# EAGLE board arduinoNanoE2training (EAGLE 9.1.1)
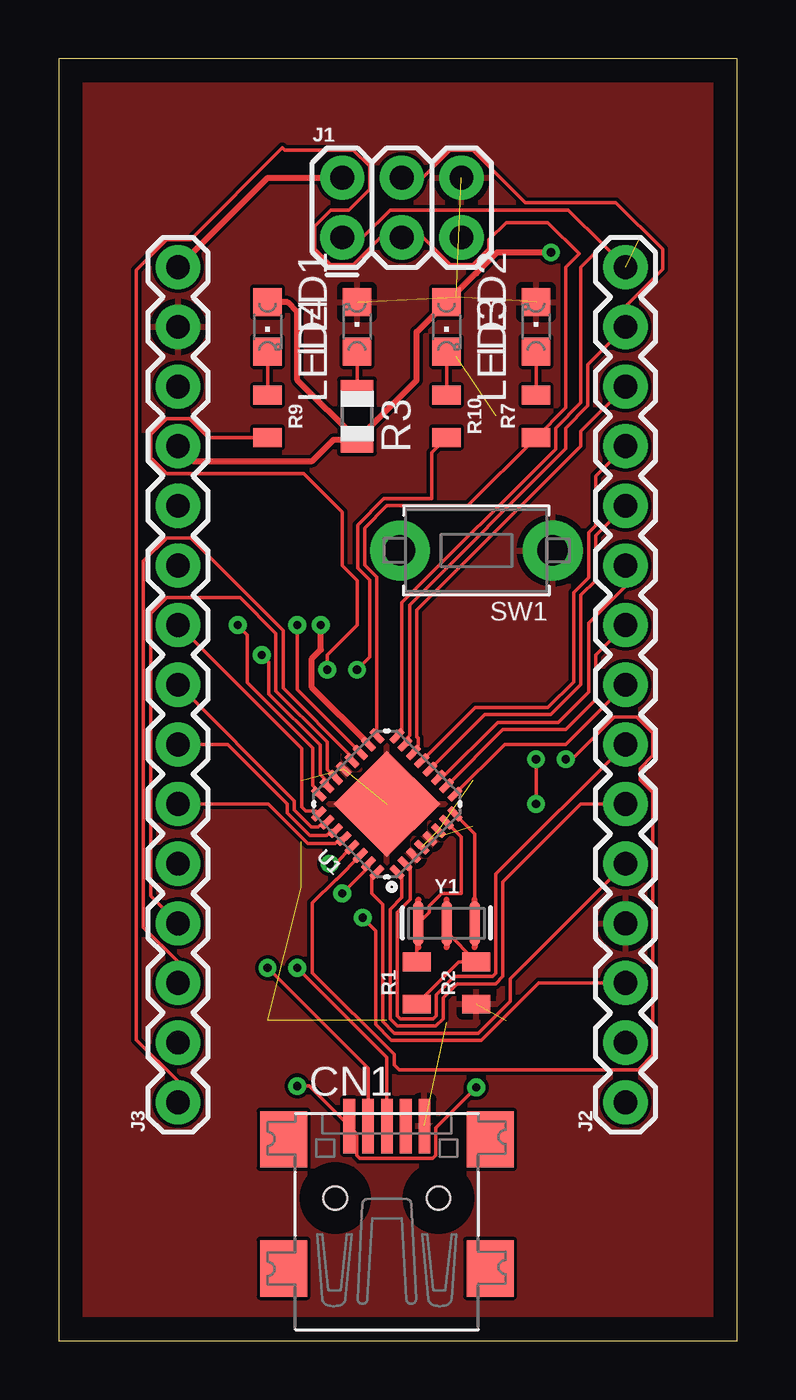
[diagram p0: board, top side]
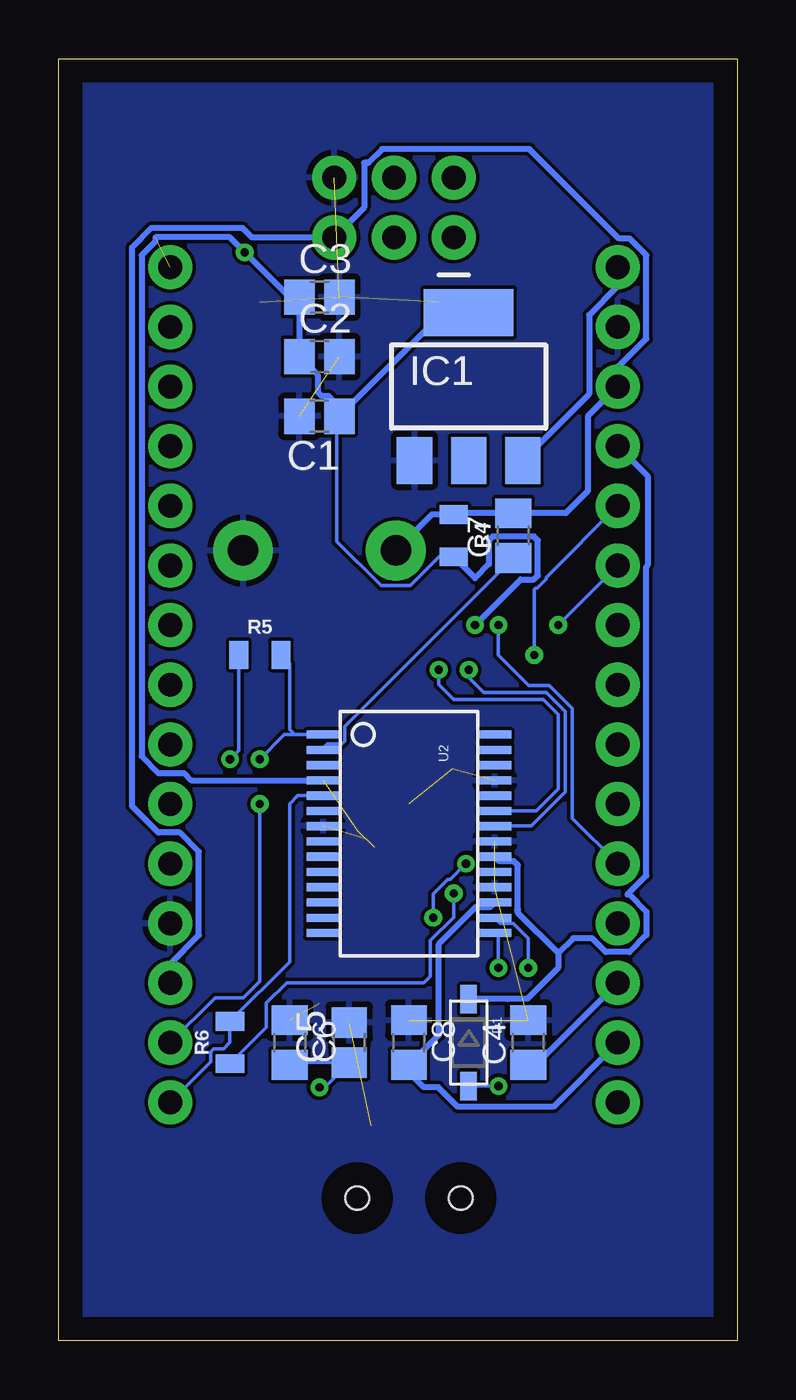
[diagram p1: board, bottom side, seen from below]

Size 28.88 x 54.6 mm. Coordinates in mm from the lower left corner, seen from the top.
Outline: 0,0 28.88,0 28.88,54.6 0,54.6 0,0
Copper layers (1*16): Top 0.035mm / dielectric 1.5mm / Bottom 0.035mm
Design rules "default": minimum track width 6mil, minimum drill 0.35mm, track to track 6mil, track to pad 6mil, pad to pad 6mil, via to via 6mil, smd to smd 6mil, copper to edge 40mil, drill to drill 6mil, minimum pad ring 10mil, minimum via ring 8mil, stop-mask expansion 4mil, vias tented up to drill 0mil, thermal gap 10mil

## Footprints (pad centres in the part's own frame; a part is rotated, then mirrored left to right if it is on the bottom)
C0805 = smd 1.3 x 1.5: 1 -0.85,0; 2 0.85,0
0805 = smd 1.27 x 1.524: 1 -0.953,0; 2 0.953,0
USB-MINIB = smd 0.5 x 2.308: D+ 0,4.064; D- -0.8,4.064; GND 1.6,4.064; ID 0.8,4.064; VBUS -1.6,4.064 | smd 2 x 2.4: GND1 -4.4,-2; GND2 -4.4,3.5; GND3 4.4,3.5; GND4 4.4,-2 | hole 1: -2.2,1; 2.2,1
SOD-123 = smd 1.2 x 0.7: A 1.85,0; C -1.85,0
SOT223 = smd 1.5 x 2: 1 -2.3,-3.15; 2 0,-3.15; 3 2.3,-3.15 | smd 3.8 x 2: 4 0,3.15
2X3 = drill 1.016 pad 1.88: 1 0,0; 2 0,2.54; 3 2.54,0; 4 2.54,2.54; 5 5.08,0; 6 5.08,2.54
1X15 = drill 1.016 pad 1.88: 1 0,0; 2 2.54,0; 3 5.08,0; 4 7.62,0; 5 10.16,0; 6 12.7,0; 7 15.24,0; 8 17.78,0; 9 20.32,0; 10 22.86,0; 11 25.4,0; 12 27.94,0; 13 30.48,0; 14 33.02,0; 15 35.56,0
CHIPLED_0805 = smd 1.2 x 1.2: A 0,-1.05; C 0,1.05
0805' = smd 0.8 x 1.2: 1 -0.9,0; 2 0.9,0
R0805 = smd 1.1 x 1.4: 1 -1,0; 2 1,0
TACT_PANA-EVQ = drill 1.3 pad 2.54: P$1 -3.25,0; P$2 3.25,0
MLF32-PAD = smd 0.7 x 0.3: 1 -2.35,1.75; 2 -2.35,1.25; 3 -2.35,0.75; 4 -2.35,0.25; 5 -2.35,-0.25; 6 -2.35,-0.75; 7 -2.35,-1.25; 8 -2.35,-1.75; 17 2.35,-1.75; 18 2.35,-1.25; 19 2.35,-0.75; 20 2.35,-0.25; 21 2.35,0.25; 22 2.35,0.75; 23 2.35,1.25; 24 2.35,1.75 | smd 0.3 x 0.7: 9 -1.75,-2.35; 10 -1.25,-2.35; 11 -0.75,-2.35; 12 -0.25,-2.35; 13 0.25,-2.35; 14 0.75,-2.35; 15 1.25,-2.35; 16 1.75,-2.35; 25 1.75,2.35; 26 1.25,2.35; 27 0.75,2.35; 28 0.25,2.35; 29 -0.25,2.35; 30 -0.75,2.35; 31 -1.25,2.35; 32 -1.75,2.35 | smd 3.2 x 3.2: PAD 0,0
SSOP28DB = smd 0.348 x 1.397: 1 -4.225,-3.656; 2 -3.575,-3.656; 3 -2.925,-3.656; 4 -2.275,-3.656; 5 -1.625,-3.656; 6 -0.975,-3.656; 7 -0.325,-3.656; 8 0.325,-3.656; 9 0.975,-3.656; 10 1.625,-3.656; 11 2.275,-3.656; 12 2.925,-3.656; 13 3.575,-3.656; 14 4.225,-3.656; 15 4.225,3.656; 16 3.575,3.656; 17 2.925,3.656; 18 2.275,3.656; 19 1.625,3.656; 20 0.975,3.656; 21 0.325,3.656; 22 -0.325,3.656; 23 -0.975,3.656; 24 -1.625,3.656; 25 -2.275,3.656; 26 -2.925,3.656; 27 -3.575,3.656; 28 -4.225,3.656
RESONATOR-SMD-3.2X1.3 = smd 0.45 x 1.905: 1 -1.2,0; 2 0,0; 3 1.2,0

## Placement (x,y rotation side)
C1  4.7uF  [C0805]  17.78,39.37 180 bottom
C2  4.7uF  [C0805]  17.78,41.91 0 bottom
C3  0.1uF  [C0805]  17.78,44.45 0 bottom
C4  0.1uF  [0805]  8.89,12.7 90 bottom
C5  4.7uF  [C0805]  16.51,12.7 90 bottom
C6  0.1uF  [0805]  19.05,12.7 270 bottom
C7  0.1uF  [0805]  9.53,34.29 90 bottom
C8  0.1uF  [0805]  13.97,12.7 270 bottom
CN1  [USB-MINIB]  13.97,5.08 0 top
D1  [SOD-123]  11.43,12.7 270 bottom
IC1  LM317MSTT3  [SOT223]  11.43,40.64 0 bottom
J1  FEMALE 2x3  [2X3]  12.06,46.99 0 top
J2  [1X15]  24.13,10.16 90 top
J3  [1X15]  5.08,10.16 90 top
LED1  [CHIPLED_0805]  12.7,43.18 0 top
LED2  [CHIPLED_0805]  20.32,43.18 0 top
LED3  [CHIPLED_0805]  16.51,43.18 180 top
LED4  [CHIPLED_0805]  8.89,43.18 180 top
R1  1M  [0805']  15.24,15.24 90 top
R2  27  [0805']  17.78,15.24 90 top
R3  680  [R0805]  12.7,39.37 270 top
R4  680  [0805']  12.06,34.29 270 bottom
R5  100  [0805']  20.32,29.21 0 bottom
R6  100  [0805']  21.59,12.7 90 bottom
R7  680  [0805']  20.32,39.37 90 top
R9  680  [0805']  8.89,39.37 270 top
R10  680  [0805']  16.51,39.37 270 top
SW1  [TACT_PANA-EVQ]  17.78,33.66 180 top
U1  [MLF32-PAD]  13.97,22.86 135 top
U2  [SSOP28DB]  13.97,21.59 270 bottom
Y1  16MHz  [RESONATOR-SMD-3.2X1.3]  16.51,17.78 0 top

## Library data of the parts
C1-C3 C5 CN1 D1 LED1-LED4 R3 SW1 = adafruit
C4 C6-C8 = cap-master
IC1 = lasser
J1 = SparkFun-Connectors; PROD_ID: CONN-11566
J2 J3 = SparkFun-Connectors
R1 R2 R4-R7 R9 R10 = SparkFun-Resistors
U1 = SparkFun-IC-Microcontroller
U2 = microbuilder
Y1 = SparkFun-Clocks; PROD_ID: XTAL-08900

## Nets
3.3V: C8.2 J3.2 U2.17
+5V: C1.1 C2.1 C3.1 D1.C IC1.4 J3.12 LED3.A LED4.A R3.2 R4.2 U1.4 U1.6 U1.18 U2.4 U2.20
A0: J3.11 U1.23
A1: J3.10 U1.24
A2: J3.9 U1.25
A3: J3.8 U1.26
A4: J3.7 U1.27
A5: J3.6 U1.28
A6: J3.5 U1.19
A7: J3.4 U1.22
AREF: C4.1 J3.3 U1.20
D0/RX: J2.2 R5.2 U2.1
D1/TX: J2.1 R6.2 U2.5
D2: J2.5 U1.32
D3: J2.6 U1.1
D4: J2.7 U1.2
D5: J2.8 U1.9
D6: J2.9 U1.10
D7: J2.10 U1.11
D8: J2.11 U1.12
D9: J2.12 U1.13
D10: J2.13 U1.14
D11/MOSI: J1.4 J2.14 U1.15
D12/MISO: J1.1 J2.15 U1.16
D13/SCK: J1.3 J3.1 R7.1 U1.17
GND: C1.2 C2.2 C3.2 C4.2 C5.2 C6.1 C8.1 CN1.GND IC1.1 J1.6 J2.4 J3.14 LED1.C LED2.C R2.1 SW1.P$1 U1.3 U1.5 U1.21 U1.PAD U2.7 U2.18 U2.21 U2.25
N$1: LED3.C R10.1
N$2: LED4.C R9.1
N$3: LED1.A R3.1
N$4: R9.2 U2.22
N$5: R10.2 U2.23
N$6: C7.1 U2.2
N$7: R1.2 U1.7 Y1.1
N$8: U1.8 Y1.3
N$9: R1.1 R2.2 Y1.2
N$10: CN1.D- U2.16
N$11: CN1.D+ U2.15
N$18: R5.1 U1.30
N$19: R6.1 U1.31
N$22: LED2.A R7.2
RESET: C7.2 J1.5 J2.3 J3.13 R4.1 SW1.P$2 U1.29
VIN: IC1.3 J1.2 J3.15
VUSB: C5.1 C6.2 CN1.VBUS D1.A

## Tracks (layer width: path | path; a pad name or v marks a point on that pad's centre or on a via)
3.3V
  Bottom 0.254: J3.2 7.81,9.97 11.9,9.97 12.72,10.79 13.34,10.79 13.97,11.43 C8.2 12.7,13.02 12.7,16.9 11.13,18.47 10.51,18.47 U2.17
+5V  (via drill 0.35)  (2 unrouted)
  Top 0.254: J3.12 5.71,37.47 10.79,37.47 11.7,38.37 R3.2 | R3.2 10.16,40.91 10.16,43.81 9.74,44.23 LED4.A | R3.2 15.24,40.91 15.24,42.96 LED3.A 17.75,45.47 17.78,45.47 18.66,46.35 v20.95,46.35 | v11.16,30.48 11.16,29.44 10.77,29.05 10.77,27.82 U1.18
  Bottom 0.152: R4.2 12.68,33.39 13.91,32.16 15.15,32.16 17.04,34.04 17.04,39.48
  Bottom 0.254: IC1.4 12.51,43.79 C1.1 17.04,39.48 17.14,39.59 17.14,40.01 17.39,40.25 17.7,40.25 17.86,40.41 17.86,41.14 C2.1 C3.1 19.05,44.45 v20.95,46.35 21.59,46.99 24.77,46.99 24.77,46.81 25.35,46.23 25.35,24.89 24.64,24.18 23.55,24.18 23.23,23.86 U2.4 | J3.12 3.81,36.83 3.81,33.02 3.86,32.97 3.86,19.82 4.68,19 4.58,19 3.86,18.29 3.86,17.27 4.58,16.56 5.58,16.56 6.17,17.14 6.99,17.14 7.62,16.51 | 7.62,16.51 7.62,15.88 8.93,14.57 9.77,14.57 9.79,14.55 D1.C | 7.62,16.51 9.34,18.23 9.34,18.3 9.37,18.34 9.34,18.38 9.34,20.25 9.5,20.42 10.12,20.42 U2.20 | R4.2 11.16,32.48 10.57,33.07 10.57,34.09 10.4,34.25 8.65,34.25 8.48,34.09 8.48,32.59 8.65,32.42 9.21,32.42 v11.16,30.48
A0  (via drill 0.35)
  Top 0.152: 11.25,23.64 U1.23 11.42,23.81 11.12,24.11 11.12,25.37 8.94,27.55 8.94,28.91 v8.64,29.21
  Bottom 0.152: v8.64,29.21 8.64,32 8.57,32.07 8.5,32.07 8.13,32.44 8.13,32.51 J3.11
A1  (via drill 0.35)
  Top 0.152: v7.62,30.48 8.04,30.07 8.04,28.03 10.82,25.24 10.82,23.64 11.07,23.39 U1.24
  Bottom 0.152: J3.10 v7.62,30.48
A2
  Top 0.152: J3.9 10.34,25.22 10.34,22.73 10.52,22.55 10.95,22.55 U1.25
A3
  Top 0.152: 5.71,27.94 J3.8 10.04,22.98 10.04,22.61 10.76,21.89 11.05,21.89 11.25,22.08 U1.26
A4
  Top 0.152: U1.27 11.61,21.73 11.41,21.53 10.68,21.53 9.73,22.48 9.73,22.86 7.19,25.4 J3.7
A5
  Top 0.152: U1.28 11.96,21.38 11.76,21.18 10.61,21.18 8.92,22.86 J3.6
A6  (via drill 0.35)
  Top 0.152: U1.19 10.16,27.73 v10.16,30.48
  Bottom 0.152: J3.5 7.01,22.25 7.01,26.92 8,27.91 8.87,27.91 10.16,29.21 v10.16,30.48
A7
  Top 0.152: J3.4 3.91,18.95 3.91,30.96 4.6,31.65 7.72,31.65 9.25,30.12 9.25,27.68 11.43,25.49 11.43,24.34 U1.22
AREF
  Top 0.152: J3.3 5.08,16.13 3.61,17.6 3.61,33.2 4.6,34.19 5.61,34.19 9.55,30.25 9.55,27.8 12.48,24.87 U1.20
  Bottom 0.254: J3.3 8.57,11.75 C4.1
D0/RX  (via drill 0.35)
  Top 0.152: v20.32,22.86 v20.32,24.77
  Bottom 0.152: R5.2 19.05,28.84 19.05,26.04 18.83,25.82 | 18.83,25.82 17.78,25.82 U2.1 | J2.2 22.23,14.61 21.02,14.61 20.32,15.3 v20.32,22.86 | v20.32,24.77 19.27,25.82 18.83,25.82
D1/TX
  Bottom 0.152: J2.1 22.42,11.87 22.42,12.29 22.29,12.43 21.86,12.43 21.59,12.7 R6.2 19.05,16.14 19.05,22.86 18.7,23.21 U2.5
D2
  Top 0.152: J2.5 19.22,15.41 19.22,14.46 17.86,13.1 14.29,13.1 13.8,13.59 13.8,18.58 13.34,19.05 13.34,19.75 U1.32
D3
  Top 0.152: J2.6 22.23,22.86 18.91,19.55 18.91,15.52 18.6,15.21 16.97,15.21 16.37,14.61 16.37,13.72 16.06,13.41 14.42,13.41 14.11,13.72 14.11,18.38 14.61,18.88 14.61,19.75 U1.1
D4
  Top 0.152: U1.2 14.95,20.11 14.95,18.79 14.41,18.25 14.41,13.85 14.54,13.71 15.94,13.71 16.07,13.85 16.07,14.74 16.84,15.51 18.48,15.51 18.61,15.64 18.61,19.88 J2.7
D5
  Top 0.152: J2.8 21.59,25.4 18.98,25.4 U1.9
D6
  Top 0.152: U1.10 18.91,26.04 21.59,26.04 22.86,27.3 22.86,29.21 J2.9
D7
  Top 0.152: J2.10 24.13,32.13 22.55,30.56 22.55,27.64 21.26,26.34 18.68,26.34 16.33,23.99 U1.11
D8
  Top 0.152: U1.12 18.13,26.67 20.95,26.67 22.23,27.94 22.23,31.75 22.86,32.38 22.86,34.29 J2.11
D9
  Top 0.152: U1.13 17.73,26.98 20.83,26.98 21.92,28.07 21.92,31.88 22.55,32.51 22.55,34.42 22.86,34.72 22.86,36.83 J2.12
D10
  Top 0.152: J2.13 22.23,38.73 22.23,38.1 15.25,31.12 15.25,25.72 15.3,25.67 15.3,25.35 15.1,25.16 U1.14
D11/MOSI
  Top 0.152: 14.92,25.41 U1.15 14.75,25.58 14.95,25.77 14.95,31.34 21.59,37.99 21.59,38.88 22.53,39.82 22.53,41.58 J2.14 24.13,44.07 25.7,45.64 25.7,46.48 23.72,48.46 19.86,48.46 17.63,50.7 16.66,50.7 15.49,49.53 J1.4
D12/MISO  (1 unrouted)
  Top 0.152: J1.1 12.95,46.99 14.12,48.16 21.69,48.16 23.18,46.67 | 24.77,46.99 25.4,46.35 | U1.16 14.61,25.97 14.61,31.43 21.15,37.98 21.15,38.87 22.23,39.94 22.23,45.72 23.18,46.67 | 23.18,46.67 J2.15
D13/SCK
  Top 0.152: U1.17 13.55,32.52 13.03,33.03 13.03,34.62 13.97,35.56 17.41,35.56 R7.1 21.59,39.74 21.59,45.72 22.16,46.29 20.82,47.62 19.05,47.62 18.31,46.89 18.31,46.51 17.63,45.82 16.66,45.82 15.49,46.99 J1.3 13.72,46.99 12.55,45.82 11.58,45.82 10.9,46.51 10.9,47.47 11.58,48.16 12.35,48.16 13.23,49.05 13.23,50.01 12.55,50.7 9.63,50.7 9.53,50.8 5.61,46.89 4.6,46.89 3.3,45.59 3.3,12.83 5.08,11.05 J3.1
GND  (12 unrouted)
  pour Top: -1.27,0 -1.27,55.88 30.48,55.88 30.48,-1.27 -1.27,-1.27
  pour Bottom: -1.27,-1.27 30.48,-1.27 30.48,55.88 -2.54,55.88 -2.54,-1.27
N$1
  Top 0.152: LED3.C R10.1
N$2
  Top 0.152: R9.1 LED4.C
N$3
  Top 0.152: LED1.A R3.1
N$4  (via drill 0.35)
  Top 0.152: R9.2 6.36,38.47 5.56,39.27 4.6,39.27 3.91,38.58 3.91,37.62 4.6,36.93 10.43,36.93 12.06,35.3 12.06,33.02 12.7,32.38 12.7,30.48 11.43,29.21 v11.43,28.57
  Bottom 0.152: U2.22 8.77,21.91 7.32,23.37 7.32,26.8 8.13,27.61 10.79,27.61 11.43,28.25 v11.43,28.57
N$5  (via drill 0.35)
  Top 0.152: R10.2 15.88,37.84 15.88,35.87 13.84,35.87 12.73,34.75 12.73,32.91 13.24,32.39 13.24,29.84 13.24,29.75 13.24,29.12 v12.7,28.57
  Bottom 0.152: U2.23 8.55,22.57 7.62,23.5 7.62,26.67 8.26,27.3 12.06,27.3 12.7,27.94 v12.7,28.57
N$6
  Bottom 0.152: U2.2 17.63,25.24 17.45,25.41 16.83,25.41 16.7,25.55 16.7,26.16 C7.1
N$7
  Top 0.152: R1.2 15.24,17.71 Y1.1 15.77,18.24 15.77,18.52 16.3,19.05 17.14,19.05 17.14,21.45 U1.7
N$8
  Top 0.152: Y1.3 17.71,21.59 U1.8
N$9
  Top 0.152: R1.1 17.04,16.14 R2.2 16.51,17.41 Y1.2
N$10  (via drill 0.35)
  Top 0.152: CN1.D- 13.17,11.6 v8.89,15.88
  Bottom 0.152: 10.08,17.78 U2.16 10.07,17.77 9.52,17.77 8.89,17.14 v8.89,15.88
N$11  (via drill 0.35)
  Top 0.152: CN1.D+ 13.97,12.06 v10.16,15.88
  Bottom 0.152: v10.16,15.88 10.16,17.21 U2.15
N$18  (via drill 0.35)
  Top 0.152: U1.30 11.83,19.66 11.81,19.66 10.79,18.64 10.79,15.67 14.28,12.19 14.28,11.76 14.5,11.53 24.66,11.53 25.3,12.17 25.3,23.34 24.77,23.88 24.77,24.38 25.3,24.92 25.3,25.88 24.61,26.57 23.65,26.57 21.84,24.77 v21.59,24.77
  Bottom 0.152: R5.1 21.22,25.14 v21.59,24.77
N$19  (via drill 0.35)
  Top 0.152: v12.06,19.05 13.19,20.18 U1.31
  Bottom 0.152: R6.1 20.04,13.35 20.04,14.38 19.18,15.24 13.34,15.24 13.06,15.52 13.06,17.04 12.06,18.04 v12.06,19.05
N$22
  Top 0.152: LED2.A R7.2
RESET  (via drill 0.35)
  Top 0.152: U1.29 11.78,20.32 v11.54,20.32 | v12.94,18.02 13.5,17.46 13.5,13.47 14.17,12.8 17.99,12.8 20.43,15.24 J2.3
  Bottom 0.152: v11.54,20.32 12.21,19.66 12.32,19.66 12.94,19.03 v12.94,18.02
  Bottom 0.254: SW1.P$2 12.99,35.19 R4.1 12.01,35.24 C7.2 7.3,35.24 6.35,36.2 6.35,39.37 J3.13 5.08,41.46 3.86,42.67 3.86,46.23 4.58,46.94 5.03,46.94 8.84,50.75 15.11,50.75 15.69,50.16 15.88,50.16 15.88,48.26 J1.5 20.66,46.99 21.07,47.4 24.93,47.4 25.76,46.57 25.76,22.76 24.64,21.64 23.73,21.64 22.91,20.82 22.91,17.27 24.13,16.06 J2.3
VIN
  Top 0.254: J3.15 8.89,49.53 J1.2
  Bottom 0.152: 12.7,49.53 J1.2
  Bottom 0.254: IC1.3 6.3,40.32 6.3,43.69 5.08,44.9 J3.15
VUSB  (via drill 0.35)
  Top 0.152: v10.16,10.85 10.66,10.85 CN1.VBUS 12.69,8.82 12.69,7.89 12.82,7.76 15.91,7.76 16.05,7.89 16.05,9.06 v17.78,10.79
  Bottom 0.152: C6.2 18.95,11.85 C5.1 17.57,10.79 v17.78,10.79 | v10.16,10.85 D1.A